# Altium PCB PCB_PDB_V2.PcbDoc (part 2 of 2)
Units mm, origin at the board's own origin, x right, y up, seen from the top; angles counter-clockwise.
Board outline 70 x 60 mm, 4 copper layers (Top Layer, Int1, Int2, Bottom Layer), stack 1.649 mm thick; 78 components, 35 nets, 226 pads, 126 vias.
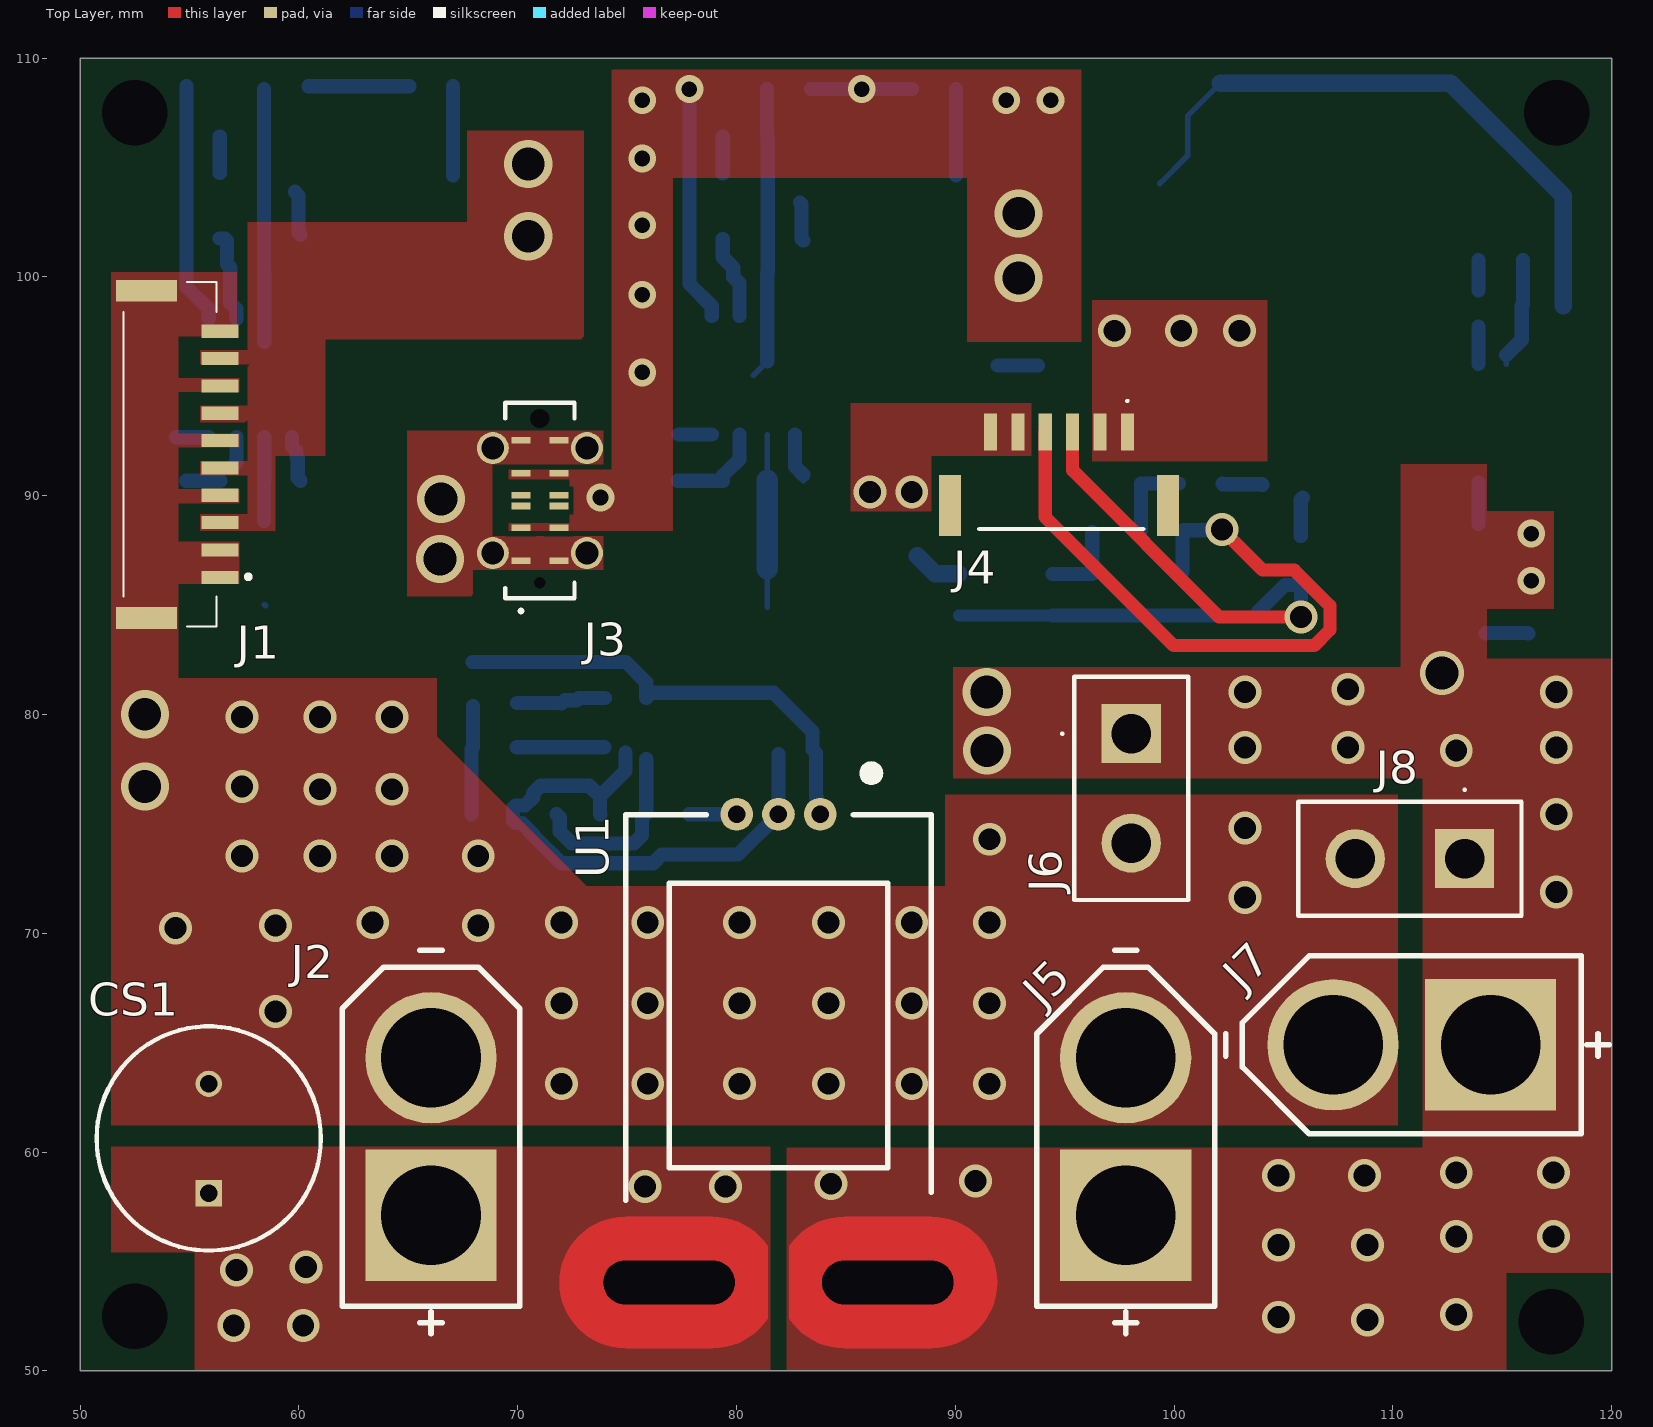
[diagram p0: Top Layer view]

## Polygon pours and split planes (outlines as drawn) (continued)
GND on Int2 "GND_L03_P046" (solid, pour order 46): 114.808,89.789 117.475,89.789 117.475,94.234 95.758,94.234 95.758,96.52 89.789,96.52 89.789,97.028 53.34,97.028 53.34,93.98 61.214,93.98 61.214,89.662 59.65,89.662 59.65,81.661 51.435,81.661 51.435,61.214 110.236,61.214 110.236,76.327 89.535,76.327 89.535,72.136 77.47,72.136 77.597,72.263 78.613,72.263 78.613,78.867 78.613,78.994 66.294,78.994 66.294,83.82 76.581,83.82 76.581,92.964 84.074,92.964 84.074,89.662 82.55,89.662 82.55,83.82 86.614,83.82 86.614,88.265 96.774,88.265 97.028,88.519 97.028,91.567 106.934,91.567 106.934,83.566 109.982,83.566 109.982,92.456 114.808,92.456
NetCS1_1 on Int2 "NETCS1_1_L03_P043" (solid, pour order 43): 81.534,50 55.245,50 55.245,55.372 51.435,55.372 51.435,60.198 81.534,60.198
"+22.2V BATTERY" on Int2 "+22.2V_BATTERY_L03_P037" (solid, pour order 37): 110.363,91.44 114.3,91.44 114.3,89.281 117.348,89.281 117.348,84.836 114.3,84.836 114.3,82.55 120.015,82.55 120.015,54.483 115.189,54.483 115.189,50.038 82.296,50.038 82.296,60.198 111.379,60.198 111.379,60.325 111.379,77.089 89.916,77.089 89.916,82.55 110.363,82.55
NetC1_1 on Int2 "NETC1_1_L03_P051" (solid, pour order 51): 112.776,107.061 112.776,103.632 111.887,103.632 111.887,97.028 106.299,97.028 106.299,107.061
"+5V PIXHAWK" on Int2 "+5V_PIXHAWK_L03_P050" (solid, pour order 50): 96.266,94.615 96.266,109.728 104.267,109.728 104.267,94.615
"+22.2V BATTERY" on Int2 "+22.2V_BATTERY_L03_P042" (solid, pour order 42): 59.182,92.837 54.483,92.837 54.356,92.964 54.356,82.169 59.182,82.169
"+22.2V BATTERY" on Int2 "+22.2V_BATTERY_L03_P038" (solid, pour order 38): 77.216,83.82 77.216,92.329 81.915,92.329 81.915,83.82

## Text inside footprints (layer, text, board x,y; h text height)
L1: Mechanical 13 "RefDes2" at 106.236,103.632 h1.27